# EAGLE board SmartGlove_Compact (EAGLE 9.2.0)
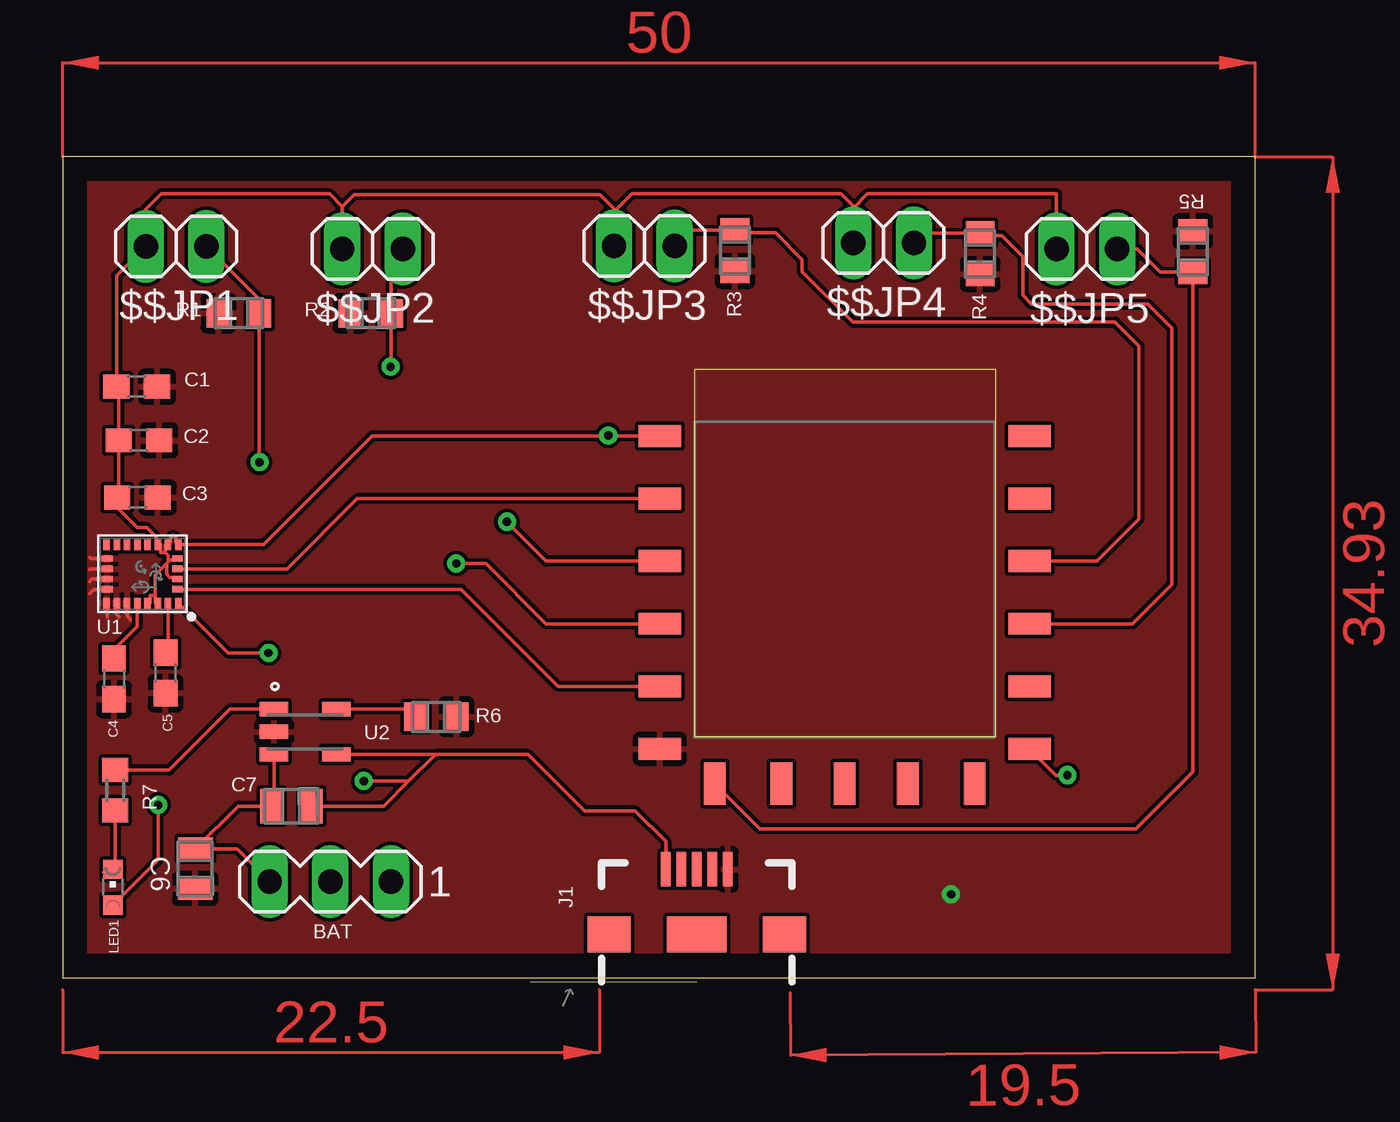
[diagram p0: board, top side]
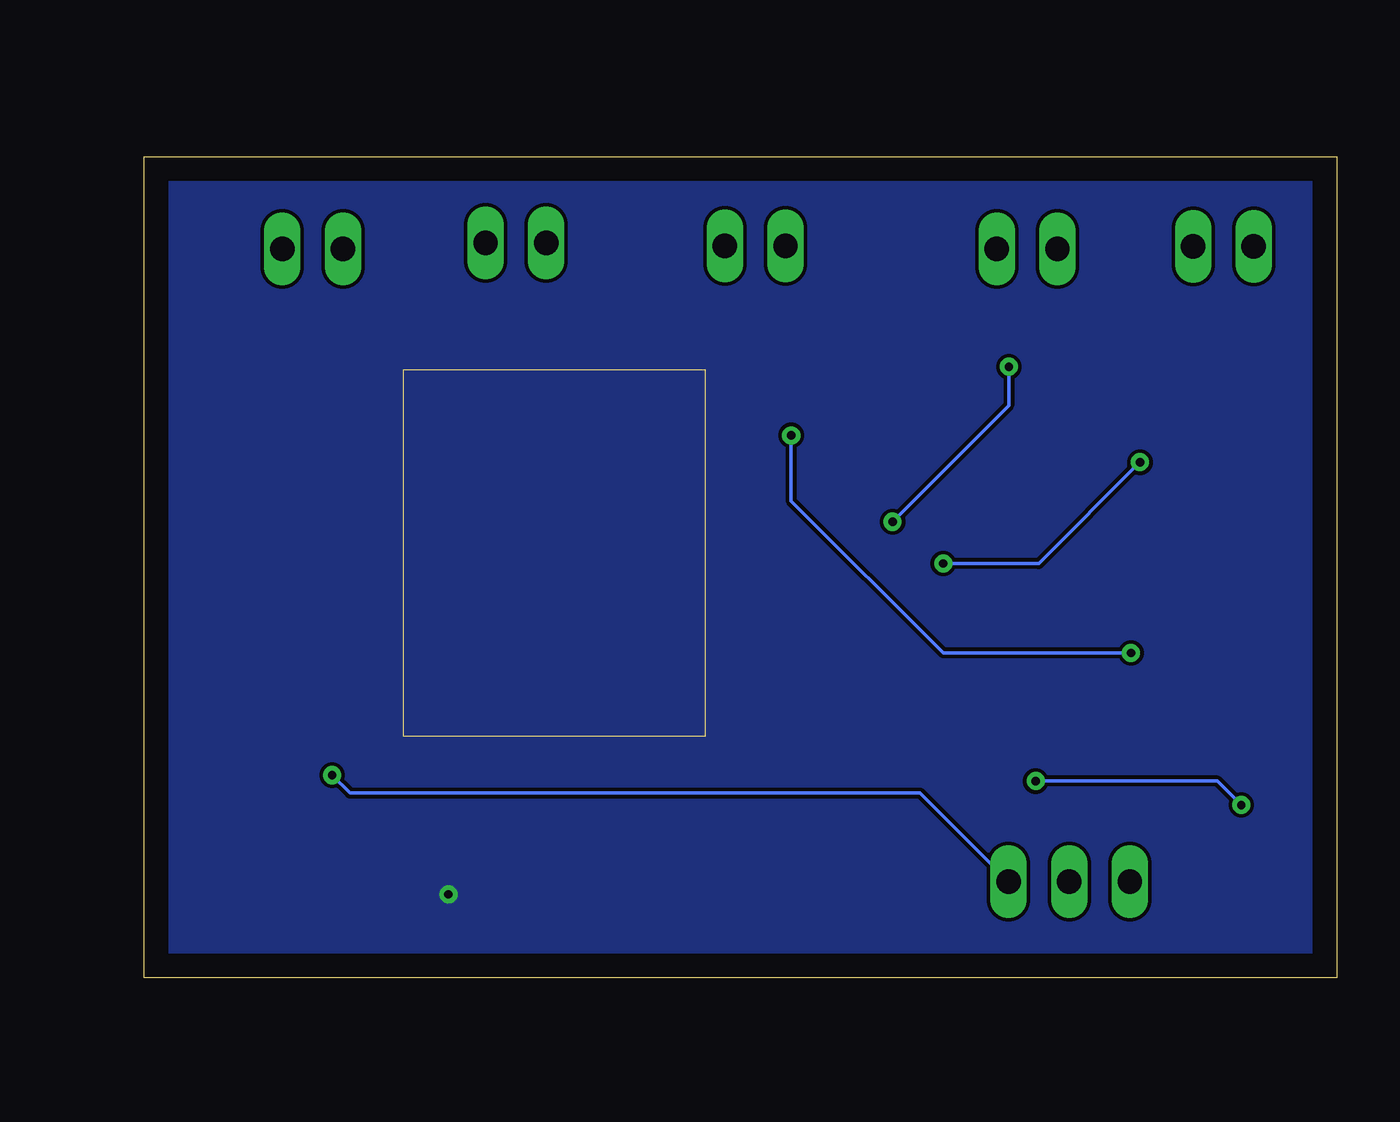
[diagram p1: board, bottom side, seen from below]

Size 50 x 34.43 mm. Coordinates in mm from the lower left corner, seen from the top.
Outline: 0,0 50,0 50,34.43 0,34.43 0,0
Copper layers (1*16): Top 0.035mm / dielectric 1.5mm / Bottom 0.035mm
Design rules "default": minimum track width 6mil, minimum drill 0.35mm, track to track 6mil, track to pad 6mil, pad to pad 6mil, via to via 6mil, smd to smd 6mil, copper to edge 40mil, drill to drill 6mil, minimum pad ring 10mil, minimum via ring 8mil, stop-mask expansion 4mil, vias tented up to drill 0mil, thermal gap 10mil
tKeepout: area 26.5,10.1 to 39.1,25.5
bKeepout: area 26.5,10.1 to 39.1,25.5
Milling: area 26.5,10.1 to 39.1,25.5

## Footprints (pad centres in the part's own frame; a part is rotated, then mirrored left to right if it is on the bottom)
1X02 = drill 1.016 long: 1 -1.27,0; 2 1.27,0
MA03-1 = drill 1.016 long: 1 -2.54,0; 2 0,0; 3 2.54,0
C0603 = smd 1.1 x 1: 1 -0.85,0; 2 0.85,0
YAG_CC0805 = smd 0.965 x 1.448: 1 -0.826,0; 2 0.826,0
USB-B-MICRO-SMD = smd 1.45 x 0.4: D+ 2.725,0; D- 2.725,0.65; GND 2.725,-1.3; ID 2.725,-0.65; VBUS 2.725,1.3 | smd 1.5 x 1.8: SHIELD1 0,3.685; SHIELD2 0,-3.685 | smd 1.5 x 2.5: SHIELD3 0,0
CHIPLED_0603 = smd 0.8 x 0.8: A 0,-0.75; C 0,0.75
RC0805N = smd 1.006 x 1.2: 1 -0.853,0; 2 0.853,0
R0603 = smd 1 x 1.1: 1 -0.85,0; 2 0.85,0
LGA-24-3.5X3 = smd 0.27 x 0.45: 1 -1.505,1.225; 6 -1.505,-1.225; 7 -1.075,-1.225; 8 -0.645,-1.225; 9 -0.215,-1.225; 10 0.215,-1.225; 11 0.645,-1.225; 12 1.075,-1.225; 13 1.505,-1.225; 18 1.505,1.225; 19 1.075,1.225; 20 0.645,1.225; 21 0.215,1.225; 22 -0.215,1.225; 23 -0.645,1.225; 24 -1.075,1.225 | smd 0.45 x 0.27: 2 -1.475,0.645; 3 -1.475,0.215; 4 -1.475,-0.215; 5 -1.475,-0.645; 14 1.475,-0.645; 15 1.475,-0.215; 16 1.475,0.215; 17 1.475,0.645
SOT23-5 = smd 1.2 x 0.6: 1 -1.306,0.95; 2 -1.306,0; 3 -1.306,-0.95; 4 1.306,-0.95; 5 1.306,0.95
BLE-NANO-PKG = smd 1.778 x 0.914: A3 7.75,4.375; A4 7.75,1.75; GND$6 -7.75,-3.5; GND$8 7.75,-0.875; RXD -7.75,1.75; SCL -7.75,-0.875; SDA -7.75,7; SWCLK 7.75,9.625; SWDIO 7.75,7; TXD -7.75,4.375; VDD -7.75,9.625; VIN 7.75,-3.5 | smd 0.914 x 1.778: P06 2.65,-4.95; P07 5.45,-4.95; P15 0,-4.95; P28 -5.45,-4.95; P29 -2.65,-4.95

## Placement (x,y rotation side)
$$JP1  [1X02]  4.75,30.68 180 top
$$JP2  [1X02]  12.99,30.57 180 top
$$JP3  [1X02]  24.39,30.69 180 top
$$JP4  [1X02]  34.41,30.82 180 top
$$JP5  [1X02]  42.94,30.57 180 top
BAT  [MA03-1]  11.22,4.04 180 top
C1  10u  [C0603]  3.1,24.79 0 top
C2  .1u  [C0603]  3.19,22.54 0 top
C3  .1u  [C0603]  3.13,20.14 0 top
C4  10n  [C0603]  2.15,12.54 270 top
C5  0.1u  [C0603]  4.31,12.79 270 top
C6  CC0805ZRY5V6BB475  [YAG_CC0805]  5.56,4.58 270 top
C7  CC0805ZRY5V6BB475  [YAG_CC0805]  9.59,7.2 0 top
J1  [USB-B-MICRO-SMD]  26.59,1.83 90 top
LED1  [CHIPLED_0603]  2.1,3.8 0 top
R1  ERJ-6GEYJ203V  [RC0805N]  7.39,27.87 0 top
R2  ERJ-6GEYJ203V  [RC0805N]  12.91,27.87 0 top
R3  ERJ-6GEYJ203V  [RC0805N]  28.19,30.5 90 top
R4  ERJ-6GEYJ203V  [RC0805N]  38.47,30.37 90 top
R5  ERJ-6GEYJ203V  [RC0805N]  47.38,30.45 270 top
R6  ERJ-6GEYJ203V  [RC0805N]  15.66,10.95 180 top
R7  [R0603]  2.2,7.87 270 top
U1  LSM9DS1  [LGA-24-3.5X3]  3.34,16.94 180 top
U2  MCP73832T-2ACI/OT  [SOT23-5]  10.16,10.32 0 top
U$1  BLE-NANO  [BLE-NANO-PKG]  32.78,13.1 0 top

## Library data of the parts
$$JP1-$$JP5 = pinhead
BAT = con-lstb; OC_FARNELL: unknown; OC_NEWARK: unknown
C1-C5 = rcl; SPICEPREFIX: C
C6 C7 = Yageo 4.7uF Cap; MANUFACTURER_PART_NUMBER: CC0805ZRY5V6BB475; VENDOR: Yageo
J1 = SparkFun-Connectors; PROD_ID: CONN-11752
LED1 = led
R1-R6 = Panasonic 20K Res; MANUFACTURER_PART_NUMBER: ERJ6GEYJ203V; VENDOR: Panasonic
R7 = rcl; SPICEPREFIX: R
U1 = SparkFun-Sensors; PROD_ID: IC-12536
U2 = MCP73832T-2ACI_OT; AVAILABILITY: Unavailable; MF: Microchip; MP: MCP73832T-2ACI-OT; PACKAGE: SOT-23-5 Microchip; PRICE: None
U$1 = BLE-NANO

## Nets
AN1: $$JP5.1 R5.2 U$1.P28
AN2: $$JP2.1 R2.2 U$1.TXD
AN3: $$JP1.1 R1.2 U$1.RXD
AN4: $$JP4.1 R4.2 U$1.A4
AN5: $$JP3.1 R3.2 U$1.A3
GND: C1.2 C2.2 C3.2 C4.2 C5.2 C6.2 J1.GND R1.1 R2.1 R3.1 R4.1 R5.1 R6.1 U1.14 U1.15 U1.16 U1.17 U1.18 U1.19 U1.20 U2.2 U$1.GND$6
N$3: U1.4 U$1.SDA
N$4: U1.2 U$1.SCL
N$5: C5.1 U1.24
N$6: C4.1 U1.21
N$8: LED1.C R7.2
N$9: R7.1 U2.1
N$16: R6.2 U2.5
VBAT: BAT.3 C6.1 C7.1 U2.3
VBUS: C7.2 J1.VBUS LED1.A U2.4
VDD: $$JP1.2 $$JP2.2 $$JP3.2 $$JP4.2 $$JP5.2 C1.1 C2.1 C3.1 U1.1 U1.3 U1.5 U1.6 U1.7 U1.8 U1.22 U1.23 U$1.VDD
VIN: BAT.1 U$1.VIN

## Tracks (layer width: path | path; a pad name or v marks a point on that pad's centre or on a via)
AN1
  Top 0.152: $$JP5.1 45.06,30.57 46.03,29.6 R5.2 47.38,8.63 45,6.25 29.23,6.25 U$1.P28
AN2  (via drill 0.35)
  Top 0.152: $$JP2.1 13.77,30.07 R2.2 13.77,25.64 v13.75,25.62 | U$1.TXD 20.27,17.48 v18.62,19.12
  Bottom 0.152: v13.75,25.62 13.75,24 v18.62,19.12
AN3  (via drill 0.35)
  Top 0.152: $$JP1.1 8.24,28.46 R1.2 8.24,21.63 v8.25,21.62 | v16.5,17.38 17.75,17.38 20.27,14.85 U$1.RXD
  Bottom 0.152: v8.25,21.62 12.5,17.38 v16.5,17.38
AN4
  Top 0.152: $$JP4.1 36.09,31.22 R4.2 38.56,31.12 39.38,31.12 40.25,30.25 40.25,28.62 40.62,28.25 45.5,28.25 46.5,27.25 46.5,16.5 44.85,14.85 U$1.A4
AN5
  Top 0.152: U$1.A3 40.62,17.48 41.23,17.48 43.35,17.48 45.12,19.25 45.12,26.5 44.12,27.5 33.12,27.5 31,29.62 31,30.12 29.88,31.25 28.29,31.25 R3.2 26.32,31.35 $$JP3.1
GND  (via drill 0.35)
  Top 0.152: 1.12,17.62 1.17,17.59 U1.14 | 1.12,17.12 1.16,17.16 U1.15 | 1.12,16.62 1.23,16.73 U1.16 | 1.12,16.12 1.29,16.3 U1.17 | U1.18 1.88,15.68 1.88,15.12 | U1.19 2.27,15.23 2.38,15.12 | U1.20 2.69,15.18 2.82,15.05 2.82,15
  other vias: 37.25,3.5
  pour Top: -2,35.5 52,35.5 52,-2.5 -2,-2.5
  pour Bottom: -4,37.5 54,37.5 54,-4.5 -4,-4.5
N$3
  Top 0.152: U$1.SDA 12.35,20.1 9.4,17.16 U1.4
N$4
  Top 0.152: U1.2 16.7,16.3 20.77,12.22 U$1.SCL
N$5
  Top 0.152: U1.24 4.42,13.74 C5.1
N$6
  Top 0.152: U1.21 3.12,14.74 2.15,13.77 C4.1
N$8
  Top 0.152: 2.12,6.95 R7.2 2.2,4.64 LED1.C
N$9
  Top 0.152: U2.1 7.02,11.27 4.47,8.72 R7.1
N$16
  Top 0.152: R6.2 14.49,11.27 U2.5
VBAT
  Top 0.152: BAT.3 7.32,5.4 C6.1 7.36,7.2 C7.1 8.86,7.3 U2.3
VBUS  (via drill 0.35)
  Top 0.152: J1.VBUS 25.29,5.71 24,7 21.88,7 19.5,9.37 15.62,9.37 | 15.62,9.37 14.51,8.25 | 14.51,8.25 13.46,7.2 C7.2 | U2.4 15.62,9.37 | LED1.A 4,4.95 v4,7.25 | v12.62,8.25 14.51,8.25
  Bottom 0.152: v4,7.25 5,8.25 v12.62,8.25
VDD  (via drill 0.35)
  Top 0.152: 4.3,17.84 4.1,17.84 4.1,18.16 U1.8 3.92,18.23 3.92,18.48 3.53,18.88 3.12,18.88 2.29,19.71 C3.1 2.35,20.2 C2.1 2.35,24.7 C1.1 2.25,29.45 $$JP1.2 | 4.3,17.84 4.3,18.16 U1.7 4.53,18.28 4.53,18.48 4.59,18.54 4.67,18.54 4.73,18.48 4.73,18.28 U1.6 8.41,18.16 12.97,22.73 22.77,22.73 22.8,22.75 v22.88,22.75 22.9,22.73 U$1.VDD | U1.22 3.67,15.71 3.67,16.04 3.87,16.04 | 3.87,16.04 3.87,15.71 U1.23 | 4.82,16.79 U1.3 4.75,16.79 4.5,16.79 4.36,16.93 4.36,17.39 | 4.82,17.55 U1.5 4.76,17.53 4.5,17.53 4.43,17.45 | 4.36,17.39 4.43,17.45 | 3.87,16.04 3.87,16.89 4.36,17.39 | 3.5,30.69 $$JP1.2 | 11.72,32.34 $$JP2.2 | 11.72,32.34 12.21,32.84 22.54,32.84 23.19,32.19 | $$JP1.2 3.48,32.23 4.12,32.88 11.19,32.88 11.72,32.34 | $$JP3.2 23.12,32.12 23.19,32.19 | 23.19,32.19 23.88,32.88 32.62,32.88 33.12,32.38 33.12,30.84 $$JP4.2 33.15,32.27 33.75,32.88 41.67,32.88 $$JP5.2 | U1.1 6.93,13.62 v8.62,13.62 | 4.3,17.84 4.43,17.71 4.43,17.45
  Bottom 0.152: v8.62,13.62 16.5,13.62 22.88,20 v22.88,22.75
VIN  (via drill 0.35)
  Top 0.152: v42.12,8.5 41.63,8.5 U$1.VIN
  Bottom 0.152: v42.12,8.5 41.38,7.75 17.47,7.75 BAT.1
(copper drawn outside any net)
  shapes: Top area x4